# Altium PCB PDB.PcbDoc
Units mil, origin at the board's own origin, x right, y up, seen from the top; angles counter-clockwise.
Board outline 6000 x 4000 mil, 2 copper layers (Top Layer, Bottom Layer); 15 components, 7 nets, 40 pads, 0 vias.
Unrouted connection lines stored in the file: 33.
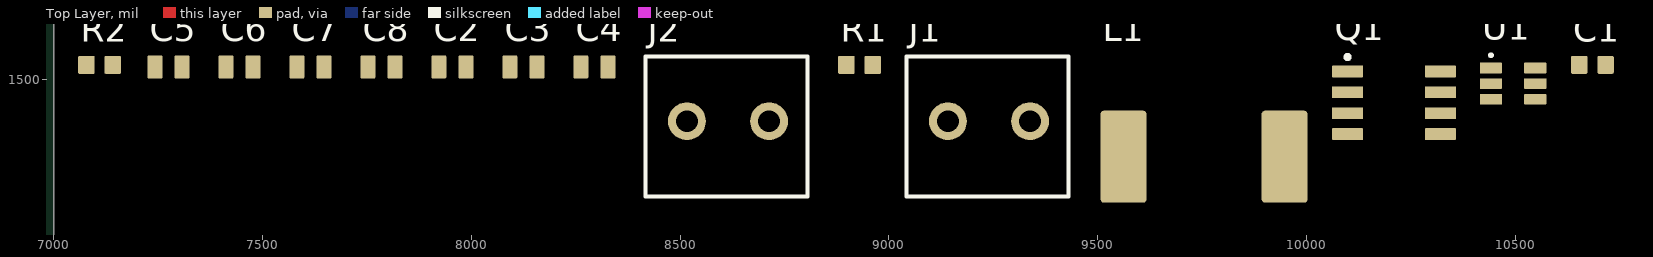
[diagram p0: Top Layer view]
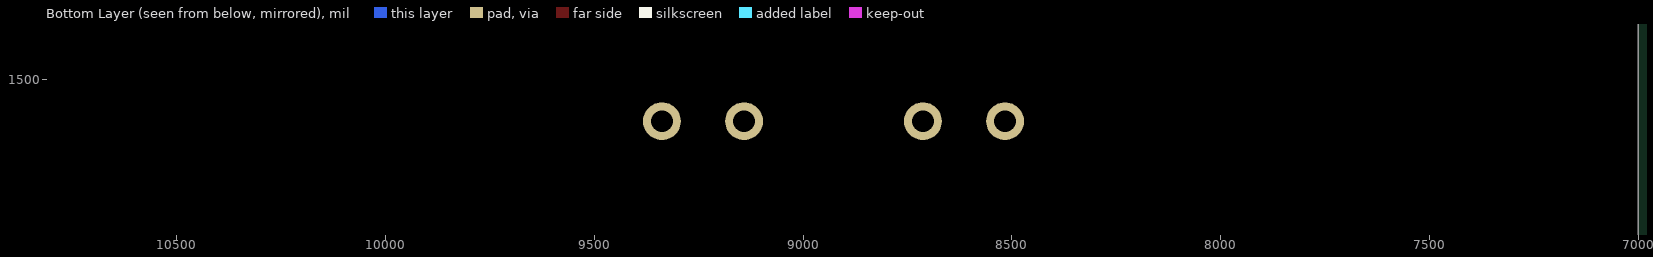
[diagram p1: Bottom Layer view, seen from below]

## Layer stack, top to bottom
Top Solder: solder mask 0.4, Solder Resist, Dk 3.5
Top Layer: signal copper 1.4
Dielectric 1: dielectric 12.6, FR-4, Dk 4.8
Bottom Layer: signal copper 1.4
Bottom Solder: solder mask 0.4, Solder Resist, Dk 3.5

## Board outline
1000,1000 7000,1000 7000,5000 1000,5000

## Design rules (kind name [scope] priority, off if disabled: settings)
Clearance [All] p1: gap=10 ignorepadtopadclearanceinfootprint=FALSE except(0: Arc-Hole Track-Hole SMDPad-Hole THPad-Hole Via-Hole Fill-Hole Poly-Hole Region-Hole Text-Hole)
PolygonConnect [All] p1: connectstyle=Relief reliefconductorwidth=10 reliefentries=4 polygonreliefangle="90 Angle" airgapwidth=10
RoutingVias [All] p1: holewidth=28 width=50 viastyle="Through Hole" minholewidth=28 minwidth=50 maxholewidth=28 maxwidth=50
SolderMaskExpansion [All] p1: expansion=4 istentingtop=FALSE
Width [All] p1: maxlimit=10 minlimit=10 preferedwidth=10
30 further rules are at their usual default settings.

## Components (designator, comment, footprint, x,y, rotation, side; value= is the part's Value field where it differs from the comment)
C1 "CAP_100nF_50V_0603" CAP0603 10685,1535 r0 top value=100nF
C2 "CAP_10uF_50V_0805" CAP0805 7955,1530 r0 top value=10uF
C3 "CAP_10uF_50V_0805" CAP0805 8125,1530 r0 top value=10uF
C4 "CAP_10uF_50V_0805" CAP0805 8295,1530 r0 top value=10uF
C5 "CAP_10uF_50V_0805" CAP0805 7275,1530 r0 top value=10uF
C6 "CAP_10uF_50V_0805" CAP0805 7445,1530 r0 top value=10uF
C7 "CAP_10uF_50V_0805" CAP0805 7615,1530 r0 top value=10uF
C8 "CAP_10uF_50V_0805" CAP0805 7785,1530 r0 top value=10uF
J1 "CON_2POS_SCREW_TERM" 1935161 9240,1400 r0 top
J2 "CON_2POS_SCREW_TERM" 1935161 8615,1400 r0 top
L1 "IND_3.3uH_9.6A" GSDRK127P-3R3M 9755,1315 r0 top value=3.3uH
Q1 "PMOS_30V_14A" SO-8_PMOS_AO4407C 10210,1445 r0 top
R1 "RES_57.6kΩ_0603_1%" RES0603 8930,1535 r0 top value=57.6kΩ
R2 "RES_10kΩ_0603_1%" RES0603 7110,1535 r0 top value=10kΩ
U1 "TPS565201DDCR" TPS565201DDCR 10495,1490 r0 top

## Footprints (in the part's own frame and the unit in brackets; to place one, negate y for a bottom-side part, rotate by r counter-clockwise, add the part's x,y. Pads: shape width x height; smd on the part's side, far side on the other; paste and mask are expansions set on the pad)
1935161 [mm] "TERM BLK 2POS SIDE ENTRY 5MM PCB"
  round 2.3 hole 1.325: 1(-2.5,0) 2(2.5,0)
  silkscreen extent -5.01,-4.57 4.83,3.94, body extent -5.01,-5.06 5.39,3.94, height 11.41
CAP0603 [mm]
  rrect20% 1x1.1 smd: 1(-0.8,0) 2(0.8,0)
  body extent -0.87,-0.48 0.88,0.48, height 0.87
CAP0805 [mm] "Chip Capacitor, Body 2.0x1.2mm, Height 0.45mm, IPC Medium Density"
  rrect15% 0.9x1.4 smd: 1(-0.825,0) 2(0.825,0)
  body extent -1.1,-0.73 1.1,0.73, height 1.39
GSDRK127P-3R3M [mm]
  rrect15% 2.8x5.6 smd: 1(-4.9,0) 2(4.9,0)
  body extent -6.25,-6.25 6.25,6.25, height 8
RES0603 [mm] "Chip Resistor, Body 1.6x0.8mm, IPC Medium Density"
  rrect15% 1x1.1 smd: 1(-0.8,0) 2(0.8,0)
  body extent -0.8,-0.4 0.8,0.4, height 0.46
SO-8_PMOS_AO4407C [mm]
  rrect15% 1.9x0.72 smd: 1(-2.827,-0.656) 1(-2.827,0.614) 1(-2.827,1.884) 2(-2.827,-1.926) 3(2.823,-1.926) 3(2.823,-0.656) 3(2.823,0.614) 3(2.823,1.884)
  silkscreen extent -2.95,2.63 -2.7,2.88, body extent -3,-2.45 3,2.45, height 1.75
TPS565201DDCR [mm] "IC REG BUCK ADJ 5A TSOT23-6"
  rrect15% 1.35x0.65 smd mask+0.102: 1(-1.35,0.95) 2(-1.35,0) 3(-1.35,-0.95) 4(1.35,-0.95) 5(1.35,0) 6(1.35,0.95)
  silkscreen extent -1.4,1.68 -1.3,1.77, body extent -1.4,-1.45 1.4,1.45, height 1.45

## Part data
C1: "CAP CER 100NF 50V X7R 0603", Manufacturer 1=KEMET, Manufacturer Part Number 1=C0603C104K5RACAUTO, Package=0603, Supplier Part Number 1=C129621, Temperature Coefficient=X7R, Tolerance=10%, Voltage=50V, Mounting Type="Surface Mount", Supplier 1=LCSC
C2 C3 C4 C5 C6 C7 C8: "CAP CER 10UF 50V X5R 0805", Manufacturer 1="Murata Electronics", Manufacturer Part Number 1=GRM21BR61H106KE43L, Package=0805, Supplier Part Number 1=C440198, Temperature Coefficient=X5R, Tolerance=10%, Voltage=50V, Mounting Type="Surface Mount", Supplier 1=LCSC, Supplier 2=Digi-Key, Supplier Part Number 2=490-18663-1-ND
J1 J2: "TERM BLK 2POS SIDE ENTRY 5MM", Manufacturer 1="Phoenix Contact", Manufacturer Part Number 1=1935161, Package/Footprint=SMD, Supplier Part Number 1=277-1667-ND, Mounting Type=TH, Supplier 1=Digi-Key
L1: "IND 3.3UH 9.6A 10M OHM 0805", Current Rating=9.6A, DC Resistance=10mΩ, Manufacturer 1="Gotrend Tech", Manufacturer Part Number 1=GSDRK127P-3R3M, Saturation Current=18A, Supplier Part Number 1=C142419, Test Frequency=100kHz, Tolerance=20%, Mounting Type="Surface Mount", Supplier 1=LCSC
Q1: "MOSFET P-CH 30V 14A SO-8", Continuous Drain Current=14A, Drain to Source Breakdown Voltage=-30V, Drain to Source On-Resistance=18.5mΩ, Drain to Source Voltage=30V, Gate to Source Voltage=25V, Manufacturer 1="Alpha & Omega Semicon", Manufacturer Part Number 1=AO4407C, Max Power Dissipation=3.1W, Package=SO-8, Supplier Part Number 1=C469397, Supplier 1=LCSC, Turn-Off Delay Time=40ns, Turn-On Delay Time=11ns
R1: "RES 57.6K OHM 1% 1/10W 0603", Manufacturer 1="Uniroyal Elec", Manufacturer Part Number 1=0603WAF5762T5E, Package=0603, Supplier Part Number 1=C23082, Tolerance=1%, Mounting Type="Surface Mount", Supplier 1=LCSC
R2: "RES 10K OHM 1% 1/10W 0603", Manufacturer 1="Uniroyal Elec", Manufacturer Part Number 1=0603WAF1002T5E, Package=0603, Supplier Part Number 1=C25804, Tolerance=1%, Mounting Type="Surface Mount", Supplier 1=LCSC
U1: "IC REG BUCK ADJ 5A TSOT23-6", Manufacturer="Texas Instruments", Package=SOT-23-6, Supplier Part Number 1=C327676, ComponentLink1Description=http://www.ti.com/lit/ds/symlink/tps565201.pdf?src-supplier=Digi-Key, ComponentLink1URL=http://www.ti.com/lit/ds/symlink/tps565201.pdf?src-supplier=Digi-Key, Manufacturer Part Number=TPS565201DDCR, Mounting Type="Surface Mount", Supplier 1=LCSC, Supplier 2=Digi-Key, Supplier Part Number 2=296-49006-1-ND

## Nets (pads, with @x,y where several pads share a name; then routed paths per layer and width w, separated by ;. In a path a pad name is that pad's centre, name@x,y a point inside that pad or via, vN(x,y) a via of type N, cw(c..) or ccw(c..) an arc to the next point about the centre after c; other vN are vias at no path point)
5V0: C5.2 C6.2 C7.2 C8.2 J2.1 L1.2 R1.2
BAT: J1.1 Q1.3
GND: C2.1 C3.1 C4.1 C5.1 C6.1 C7.1 C8.1 J1.2 J2.2 Q1.2 R2.1 U1.1
NetC1_1: C1.1 U1.6
NetC1_2: C1.2 L1.1 U1.2
NetR1_1: R1.1 R2.2 U1.4
VBAT: C2.2 C3.2 C4.2 Q1.1 U1.3 U1.5